# EAGLE board Board (EAGLE 9.2.2)
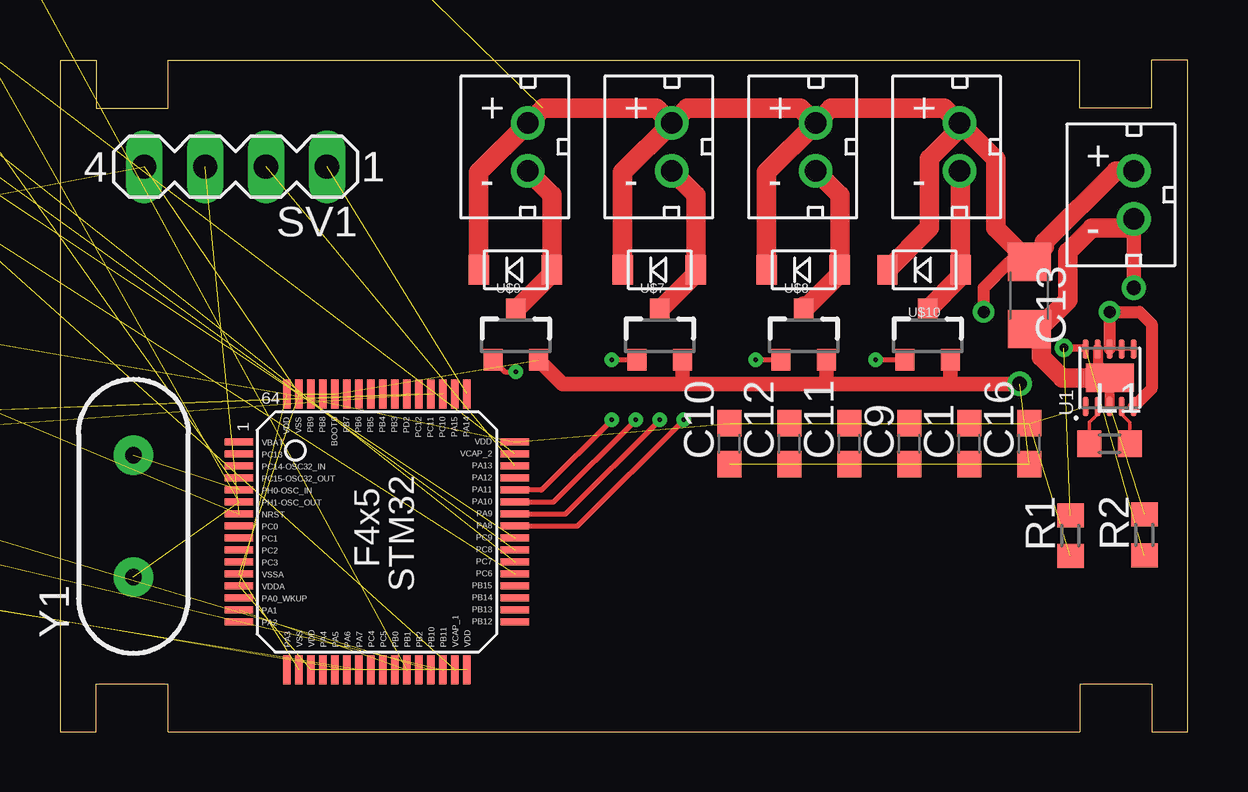
[diagram p0: board, top side]
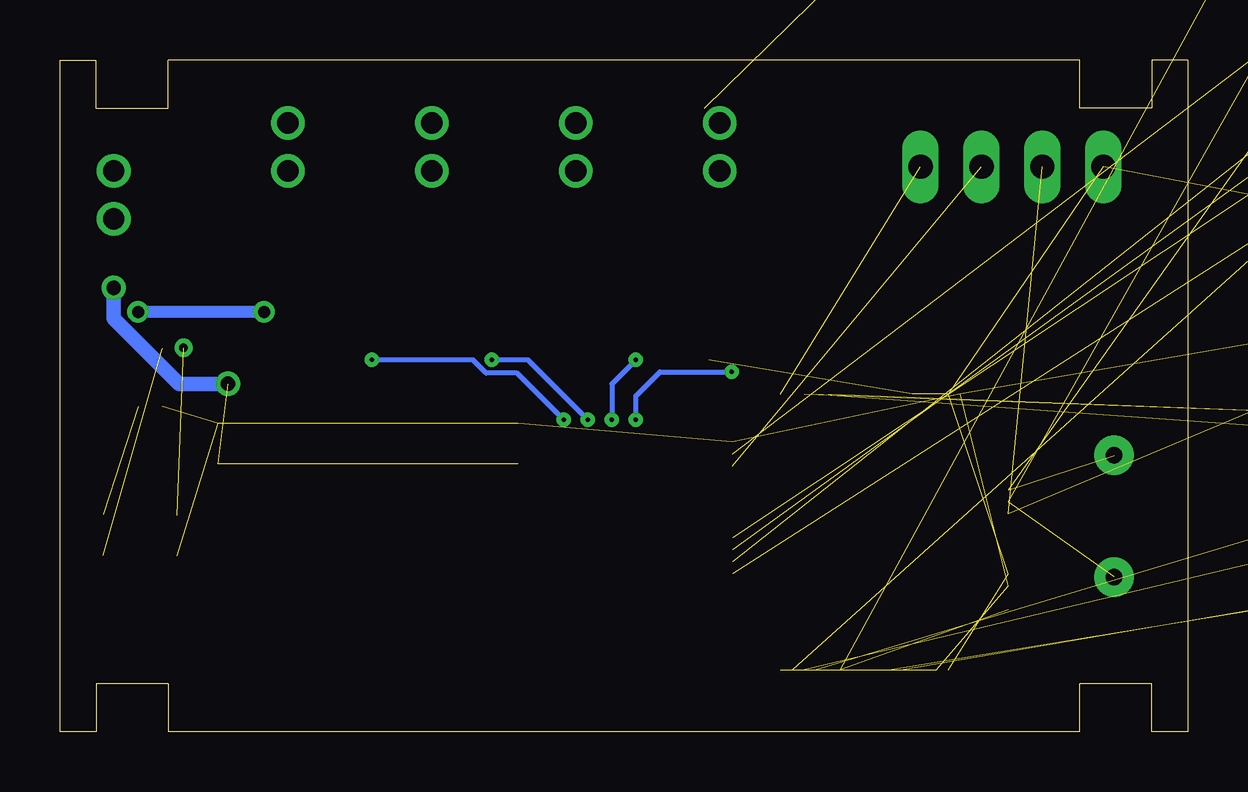
[diagram p1: board, bottom side, seen from below]

Size 47 x 28 mm. Coordinates in mm from the lower left corner, seen from the top.
Outline: 47,0 47,28 45.5,28 45.5,26 42.5,26 42.5,28 4.5,28 4.5,26 1.5,26 1.5,28 0,28 0,0 1.5,0 1.5,2 4.5,2 4.5,0 42.5,0 42.5,2 45.5,2 45.5,0 47,0
Copper layers (1*16): Top 0.035mm / dielectric 1.5mm / Bottom 0.035mm
Design rules "default": minimum track width 6mil, minimum drill 0.35mm, track to track 6mil, track to pad 6mil, pad to pad 6mil, via to via 6mil, smd to smd 6mil, copper to edge 40mil, drill to drill 6mil, minimum pad ring 10mil, minimum via ring 8mil, stop-mask expansion 4mil, vias tented up to drill 0mil, thermal gap 10mil

## Footprints (pad centres in the part's own frame; a part is rotated, then mirrored left to right if it is on the bottom)
C0603 = smd 1.1 x 1: 1 -0.85,0; 2 0.85,0
C1206 = smd 1.6 x 1.8: 1 -1.4,0; 2 1.4,0
L0603 = smd 1 x 1.1: 1 -0.85,0; 2 0.85,0
CHIP-LED0603 = smd 0.8 x 0.8: A 0,-0.75; C 0,0.75
WIRELESS-NRF24L01 = drill 1 square: 1 -12.7,6.35 | drill 1: 2 -10.16,6.35; 3 -12.7,3.81; 4 -10.16,3.81; 5 -12.7,1.27; 6 -10.16,1.27; 7 -12.7,-1.27; 8 -10.16,-1.27
R0603 = smd 1 x 1.1: 1 -0.85,0; 2 0.85,0
TACTILE-SWITCH-SMD = smd 1.524 x 0.762: 1 -2.794,1.905; 2 2.794,1.905; 3 -2.794,-1.905; 4 2.794,-1.905
MA04-1 = drill 1.016 long: 1 -3.81,0; 2 -1.27,0; 3 1.27,0; 4 3.81,0
SON50P250X250X80-11N = smd 0.81 x 0.27: 1 -1.205,1; 2 -1.205,0.5; 3 -1.205,0; 4 -1.205,-0.5; 5 -1.205,-1; 6 1.205,-1; 7 1.205,-0.5; 8 1.205,0; 9 1.205,0.5; 10 1.205,1 | smd 1.2 x 2: 11 0,0
GY-521 = drill 0.8 pad 1.778 long: ADO -8.89,-6.35; GND -8.89,6.35; INT -8.89,-8.89; SCL -8.89,3.81; SDA -8.89,1.27; VCC -8.89,8.89; XCL -8.89,-3.81; XDA -8.89,-1.27
STM32F405/415_LQFP64 = smd 1.2 x 0.3: BOOT0 -5.75,-1.75; PA3 5.75,-3.75; PA4 5.75,-2.25; PA5 5.75,-1.75; PA6 5.75,-1.25; PA7 5.75,-0.75; PA14 -5.75,3.75; PA15 -5.75,3.25; PB0 5.75,0.75; PB1 5.75,1.25; PB2 5.75,1.75; PB3 -5.75,0.75; PB4 -5.75,0.25; PB5 -5.75,-0.25; PB6 -5.75,-0.75; PB7 -5.75,-1.25; PB8 -5.75,-2.25; PB9 -5.75,-2.75; PB10 5.75,2.25; PB11 5.75,2.75; PC4 5.75,-0.25; PC5 5.75,0.25; PC10 -5.75,2.75; PC11 -5.75,2.25; PC12 -5.75,1.75; PD2 -5.75,1.25; VCAP_1 5.75,3.25; VDD_0 5.75,-2.75; VDD_1 5.75,3.75; VDD_3 -5.75,-3.75; VSS_0 5.75,-3.25; VSS_1 -5.75,-3.25 | smd 0.3 x 1.2: NRST -0.75,-5.75; PA0_WKUP 2.75,-5.75; PA1 3.25,-5.75; PA2 3.75,-5.75; PA8 -0.25,5.75; PA9 -0.75,5.75; PA10 -1.25,5.75; PA11 -1.75,5.75; PA12 -2.25,5.75; PA13 -2.75,5.75; PB12 3.75,5.75; PB13 3.25,5.75; PB14 2.75,5.75; PB15 2.25,5.75; PC0 -0.25,-5.75; PC1 0.25,-5.75; PC2 0.75,-5.75; PC3 1.25,-5.75; PC6 1.75,5.75; PC7 1.25,5.75; PC8 0.75,5.75; PC9 0.25,5.75; PC13 -3.25,-5.75; PC14 -2.75,-5.75; PC15 -2.25,-5.75; PH0 -1.75,-5.75; PH1 -1.25,-5.75; VBAT -3.75,-5.75; VCAP_2 -3.25,5.75; VDD_2 -3.75,5.75; VDDA 2.25,-5.75; VSSA 1.75,-5.75
JST_CONNECTOR_FEMALE = drill 0.889: + 0,1; - 0,-1
SOT23-3 = smd 0.8 x 0.9: 1 -0.95,-1; 2 0.95,-1; 3 0,1.1
MINI2-F3-B = smd 1.22 x 0.85: NEG 0,1.55; POS 0,-1.5
HC49US = drill 0.7 pad 1.651: 1 -2.54,0; 2 2.54,0

## Placement (x,y rotation side)
C1  100nF  [C0603]  37.9,12 90 top
C2  10uF  [C0603]  -57.15,50.8 0 top  (outside the outline)
C3  22uF  [C0603]  -63.5,50.8 0 top  (outside the outline)
C4  16pF  [C0603]  -17.78,55.88 0 top  (outside the outline)
C5  16pF  [C0603]  -24.13,55.88 0 top  (outside the outline)
C6  1uF  [C0603]  -62.23,55.88 0 top  (outside the outline)
C7  100nF  [C0603]  -46.99,45.72 0 top  (outside the outline)
C8  10uF  [C0603]  -30.48,55.88 0 top  (outside the outline)
C9  100nF  [C0603]  35.4,12 90 top
C10  100nF  [C0603]  27.9,12 90 top
C11  100nF  [C0603]  32.9,12 90 top
C12  100nF  [C0603]  30.4,12 90 top
C13  100uF  [C1206]  40.4,18.18 270 top
C14  2.2uF  [C0603]  -31.75,50.8 0 top  (outside the outline)
C15  2.2uF  [C0603]  -38.1,50.8 0 top  (outside the outline)
C16  4.7uF  [C0603]  40.4,12 90 top
L1  2.2uH  [L0603]  43.75,12 0 top
LED1  Blue  [CHIP-LED0603]  -41.91,38.1 0 top  (outside the outline)
LED2  Green  [CHIP-LED0603]  -55.88,24.13 0 top  (outside the outline)
LED3  Green  [CHIP-LED0603]  -60.96,24.13 0 top  (outside the outline)
LED4  Blue  [CHIP-LED0603]  -46.99,38.1 0 top  (outside the outline)
M1  WIRELESS-NRF24L01  [WIRELESS-NRF24L01]  -44.45,10.16 0 top  (outside the outline)
R1  487k  [R0603]  42.12,8.17 90 top
R2  86.6k  [R0603]  45.2,8.2 90 top
R3  10k  [R0603]  -16.51,60.96 0 top  (outside the outline)
R4  10k  [R0603]  -21.59,60.96 0 top  (outside the outline)
R11  1k  [R0603]  -57.15,55.88 0 top  (outside the outline)
R12  1k  [R0603]  -41.91,55.88 0 top  (outside the outline)
R13  1k  [R0603]  -46.99,55.88 0 top  (outside the outline)
R14  1k  [R0603]  -52.07,55.88 0 top  (outside the outline)
S1  SWITCH-MOMENTARY-2SMD  [TACTILE-SWITCH-SMD]  -57.15,39.37 0 top  (outside the outline)
SV1  [MA04-1]  7.32,23.55 180 top
U1  RT6150AGQW  [SON50P250X250X80-11N]  43.75,14.75 90 top
U2  GY-521MPU6050  [GY-521]  -17.78,11.43 0 top  (outside the outline)
U$1  STM32F405/415_LQFP64  [STM32F405/415_LQFP64]  13.21,8.32 270 top
U$2  JST_CONNECTOR_FEMALE  [JST_CONNECTOR_FEMALE]  44.76,22.37 0 top
U$3  JST_CONNECTOR_FEMALE  [JST_CONNECTOR_FEMALE]  19.5,24.37 0 top
U$4  JST_CONNECTOR_FEMALE  [JST_CONNECTOR_FEMALE]  25.5,24.37 0 top
U$5  JST_CONNECTOR_FEMALE  [JST_CONNECTOR_FEMALE]  31.5,24.37 0 top
U$6  JST_CONNECTOR_FEMALE  [JST_CONNECTOR_FEMALE]  37.5,24.37 0 top
U$7  N-CHANNEL-MOSFET-IRLML6244TRPBF  [SOT23-3]  25,16.5 0 top
U$8  N-CHANNEL-MOSFET-IRLML6244TRPBF  [SOT23-3]  31,16.5 0 top
U$9  N-CHANNEL-MOSFET-IRLML6244TRPBF  [SOT23-3]  19,16.5 0 top
U$10  N-CHANNEL-MOSFET-IRLML6244TRPBF  [SOT23-3]  36.17,16.5 0 top
U$11  DB2W40300L  [MINI2-F3-B]  19,19.25 90 top
U$12  DB2W40300L  [MINI2-F3-B]  31,19.25 90 top
U$13  DB2W40300L  [MINI2-F3-B]  25,19.25 90 top
U$14  DB2W40300L  [MINI2-F3-B]  36.04,19.25 90 top
Y1  12MHz  [HC49US]  3.06,8.98 90 top

## Library data of the parts
C1-C13 C16 = rcl; SPICEPREFIX: C
C14 C15 = rcl
L1 = rcl-2
LED1-LED4 = led
M1 U2 U$1-U$6 U$11-U$14 Y1 = AP_quad
R1-R4 R11-R14 = rcl; SPICEPREFIX: R
S1 = AP_quad; PROD_ID: SWCH-08247
SV1 = con-lstb; OC_FARNELL: unknown; OC_NEWARK: unknown
U1 = RT6150AGQW; AVAILABILITY: Unavailable; DESCRIPTION: Dc-Dc Conv, Buck/Boost, 1mhz, Wdfn-10; MF: Richtek USA; MP: RT6150AGQW; PACKAGE: WFDFN-10 Richtek; PRICE: None
U$7-U$10 = AP_quad; DATASHEET: http://www.mouser.com/ds/2/196/irlml6244pbf-936666.pdf; MOUSER: 942-IRLML6244TRPBF; URL: http://www.mouser.com/Search/ProductDetail.aspx?R=IRLML6244TRPBFvirtualkey57370000virtualkey942-IRLML6244TRPBF

## Nets
3.7V: C2.2 C13.1 R3.2 U1.5 U1.6 U1.7 U1.8 U$2.+ U$3.+ U$4.+ U$5.+ U$6.+ U$11.NEG U$12.NEG U$13.NEG U$14.NEG
ANALOG: R3.1 R4.2 U$1.PA1 U$1.PB1
CE: M1.3 U$1.PA7
CSN: M1.4 U$1.PA6
FB: R1.2 R2.1 U1.10
GND: C1.1 C2.1 C3.2 C4.2 C5.2 C6.1 C7.1 C8.1 C9.1 C10.1 C11.1 C12.1 C13.2 C14.2 C15.1 C16.1 LED1.C LED2.C LED3.C LED4.C M1.1 R2.2 R4.1 S1.1 SV1.4 U1.3 U1.9 U1.11 U2.GND U$1.BOOT0 U$1.VSS_0 U$1.VSS_1 U$1.VSSA U$2.- U$7.2 U$8.2 U$9.2 U$10.2
LED_MISO: R14.1 U$1.PC9
LED_PWR: R11.1 U$1.PC6
LED_RST: R12.1 U$1.PC7
LED_SWDIO: R13.1 U$1.PC8
MISO: M1.7 U$1.PC11
MOSI: M1.6 U$1.PC12
N$1: L1.2 U1.4
N$2: L1.1 U1.2
N$4: U$3.- U$9.3 U$11.POS
N$5: U$5.- U$8.3 U$12.POS
N$6: U$4.- U$7.3 U$13.POS
N$7: U$6.- U$10.3 U$14.POS
N$8: LED1.A R11.2
N$9: LED4.A R12.2
N$10: LED2.A R13.2
N$11: LED3.A R14.2
N$12: C15.2 U$1.VCAP_1
N$13: C14.1 U$1.VCAP_2
OSC_IN: C5.1 U$1.PH0 Y1.2
OSC_OUT: C4.1 U$1.PH1 Y1.1
RESET: C6.2 S1.3 SV1.3 U$1.NRST
SCK: M1.5 U$1.PC10
SCL: U2.SCL U$1.PB10
SDA: U2.SDA U$1.PB11
SWCLK: SV1.1 U$1.PA14
SWDIO: SV1.2 U$1.PA13
TIM1: U$1.PA8 U$10.1
TIM2: U$1.PA9 U$8.1
TIM3: U$1.PA10 U$7.1
TIM4: U$1.PA11 U$9.1
VOUT: C1.2 C3.1 C7.2 C8.2 C9.2 C10.2 C11.2 C12.2 C16.2 M1.2 R1.1 U1.1 U2.VCC U$1.VDD_0 U$1.VDD_1 U$1.VDD_2 U$1.VDD_3 U$1.VDDA

## Tracks (layer width: path | path; a pad name or v marks a point on that pad's centre or on a via)
3.7V  (via drill 0.5)  (2 unrouted)
  Top 0.152: U1.8 U1.7 U1.6
  Top 0.508: U1.5 45.5,14.29 45.5,17 45,17.5 v43.75,17.5 U1.8 | v38.5,17.5 38.5,18.5 39.58,19.58 C13.1
  Top 0.813: C13.1 41.03,20.21 41.03,20.4 44.01,23.37 U$2.+ | 40.56,19.75 C13.1 | U$6.+ 37.5,25.15 36.24,23.89 36.24,21 U$14.NEG | U$6.+ 36.87,26 32.13,26 U$5.+ | U$13.NEG 23.45,23.32 U$4.+ | U$6.+ 39,23.87 39,21 C13.1 | U$5.+ 30.87,26 26.13,26 U$4.+ | U$4.+ 24.87,26 20.13,26 U$3.+ 17.45,23.32 U$11.NEG | U$12.NEG 29.45,23.32 U$5.+
  Bottom 0.508: v38.5,17.5 v43.75,17.5
ANALOG  (3 unrouted)
CE  (1 unrouted)
CSN  (1 unrouted)
FB  (via drill 0.35)  (3 unrouted)
  Top 0.305: v41.85,16 42.7,16 U1.10
GND  (via drill 0.6)  (29 unrouted)
  Top 0.406: U1.9 43.25,15.25 U1.11 U1.3
  Top 0.61: U$2.- v44.76,18.5 | v40,14.5 37,14.5 | 37,14.5 32,14.5 | 32,14.5 26,14.5 | 26,14.5 20.95,14.5 U$9.2 | U$7.2 25.95,14.55 26,14.5 | 32,14.5 31.95,14.55 U$8.2 | U$10.2 37.12,14.62 37,14.5
  Top 0.813: U$2.- 44.39,21 43,21 42,20 42,18 40.78,16.78 C13.2 40.91,16.27 40.91,15.61 41.77,14.75 U1.11
  Bottom 0.61: v44.76,18.5 44.76,17.22 42.04,14.5 v40,14.5
LED_MISO  (1 unrouted)
LED_PWR  (1 unrouted)
LED_RST  (1 unrouted)
LED_SWDIO  (1 unrouted)
MISO  (1 unrouted)
MOSI  (1 unrouted)
N$1
  Top 0.152: U1.4 44.27,13.53 44.27,13.22 44.6,12.89 L1.2
N$2
  Top 0.152: L1.1 42.9,12.9 42.91,12.91 42.92,12.91 43.25,13.24 U1.2
N$4
  Top 0.813: U$3.- 20.5,22.37 U$11.POS 20.5,19.1 U$9.3
N$5
  Top 0.813: 31,17.75 U$8.3 32.5,19.1 U$12.POS 32.5,22.37 U$5.-
N$6
  Top 0.813: U$4.- 26.5,22.37 U$13.POS 26.5,19.1 U$7.3
N$7
  Top 0.813: 37.5,19.29 U$14.POS | U$14.POS 37.54,18.97 U$10.3 | U$14.POS 37.54,23.33 U$6.-
N$8  (1 unrouted)
N$9  (1 unrouted)
N$10  (1 unrouted)
N$11  (1 unrouted)
N$12  (1 unrouted)
N$13  (1 unrouted)
OSC_IN  (2 unrouted)
OSC_OUT  (2 unrouted)
RESET  (3 unrouted)
SCK  (1 unrouted)
SCL  (1 unrouted)
SDA  (1 unrouted)
SWCLK  (1 unrouted)
SWDIO  (1 unrouted)
TIM1  (via drill 0.2)
  Top 0.2: U$10.1 v34,15.5 | U$1.PA8 21.57,8.57 v26,13
  Bottom 0.2: v26,13 27.94,14.94 29.23,14.94 29.79,15.5 v34,15.5
TIM2  (via drill 0.2)
  Top 0.2: U$8.1 v29,15.5 | U$1.PA9 21.07,9.07 v25,13
  Bottom 0.2: v25,13 27.5,15.5 v29,15.5
TIM3  (via drill 0.2)
  Top 0.2: U$7.1 v23,15.5 | U$1.PA10 20.57,9.57 v24,13
  Bottom 0.2: v23,15.5 24,14.5 v24,13
TIM4  (via drill 0.2)
  Top 0.2: v23,13 20.07,10.07 U$1.PA11 | U$9.1 18.55,15 v19,15
  Bottom 0.2: v23,13 23,14 22,15 v19,15
VOUT  (17 unrouted)